# Altium PCB ukpg.PcbDoc
Units mm, origin at the board's own origin, x right, y up, seen from the top; angles counter-clockwise.
Board outline 54 x 58 mm, 2 copper layers (Top Layer, Bottom Layer); 7 components, 5 nets, 38 pads, 0 vias.
Unrouted connection lines stored in the file: 4.
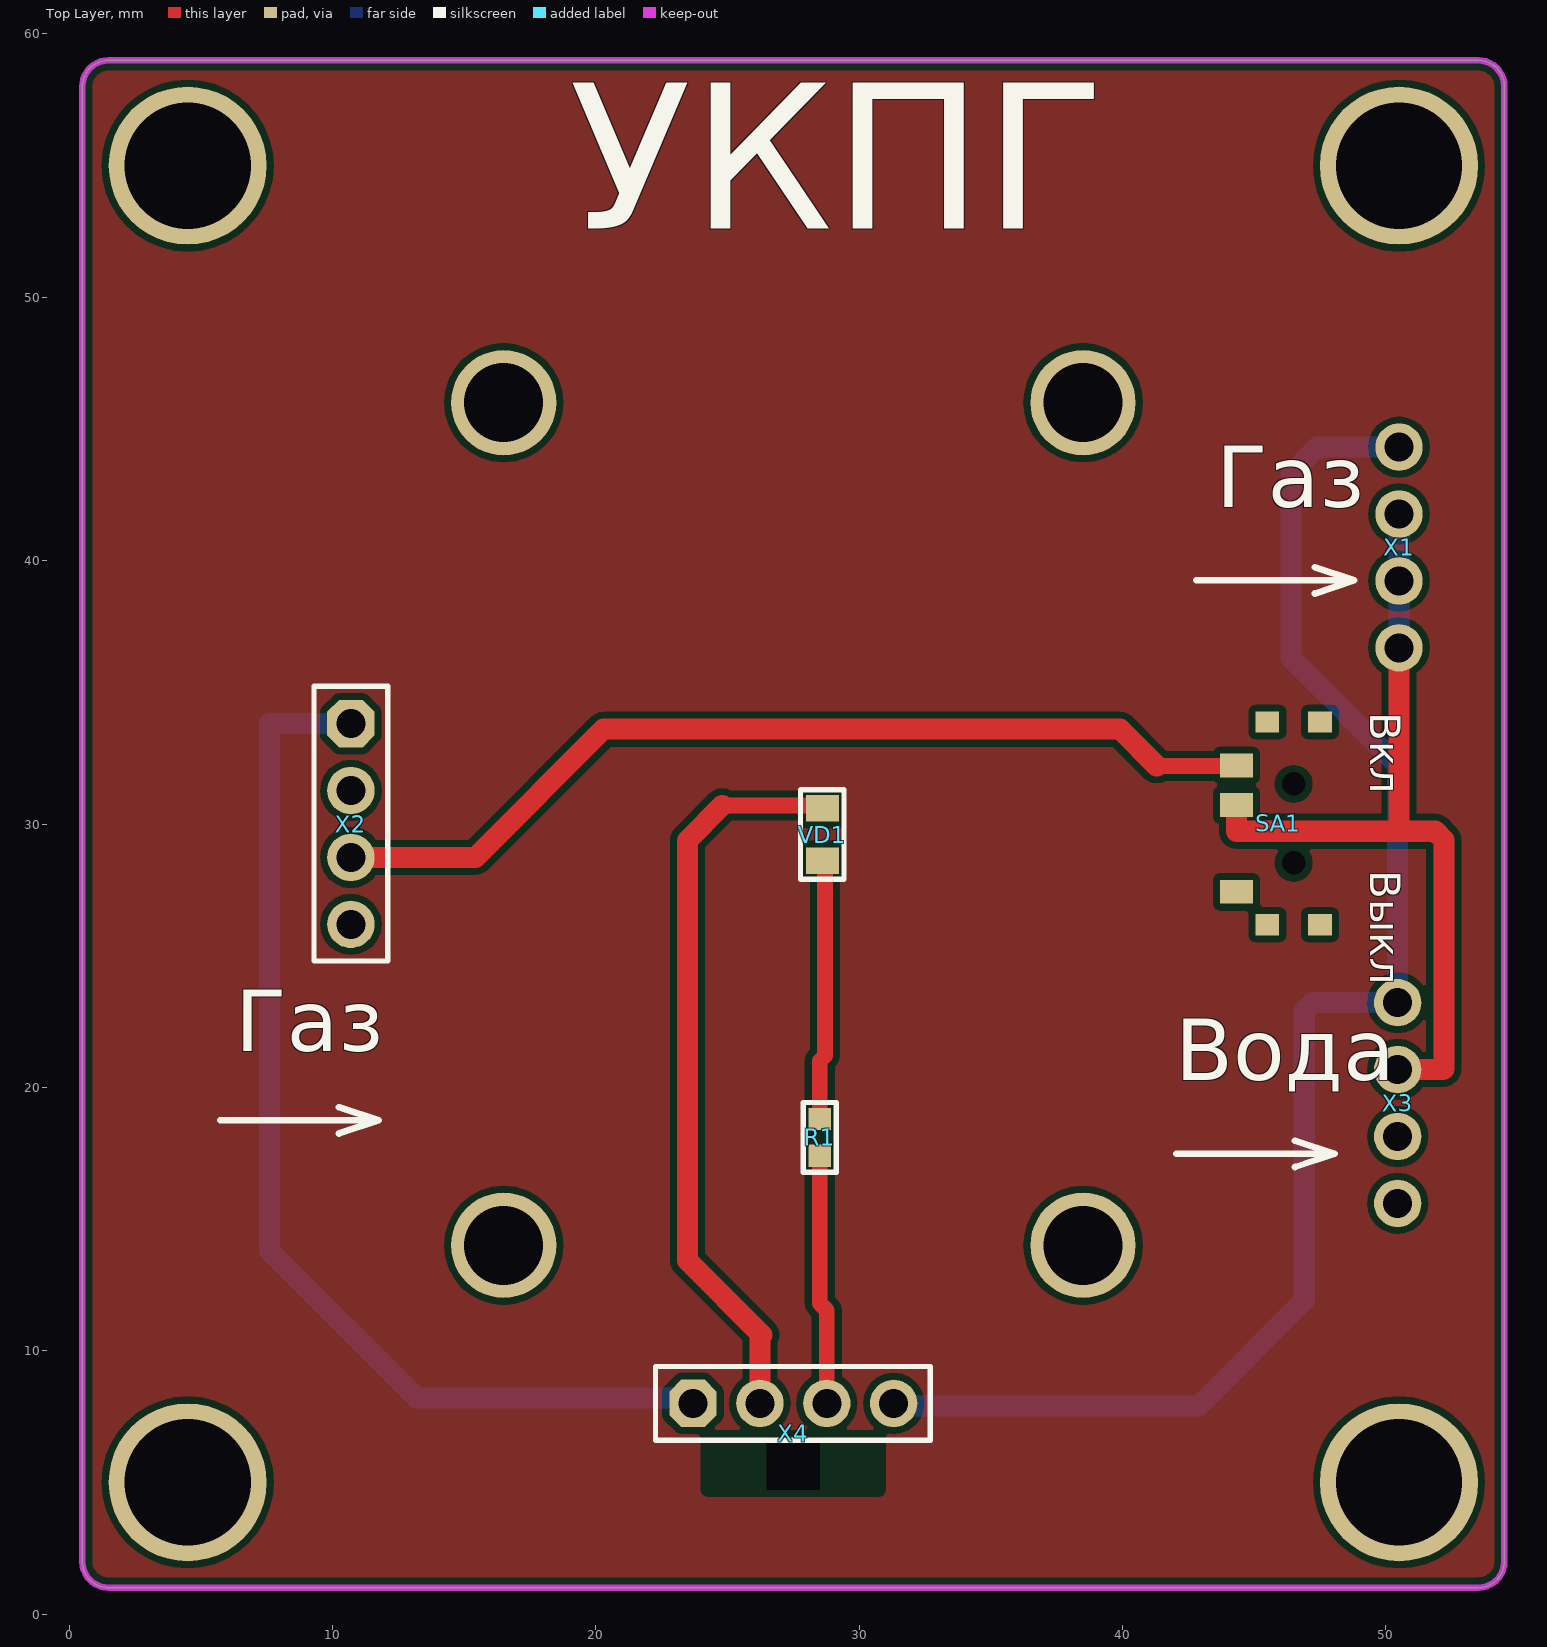
[diagram p0: Top Layer view]
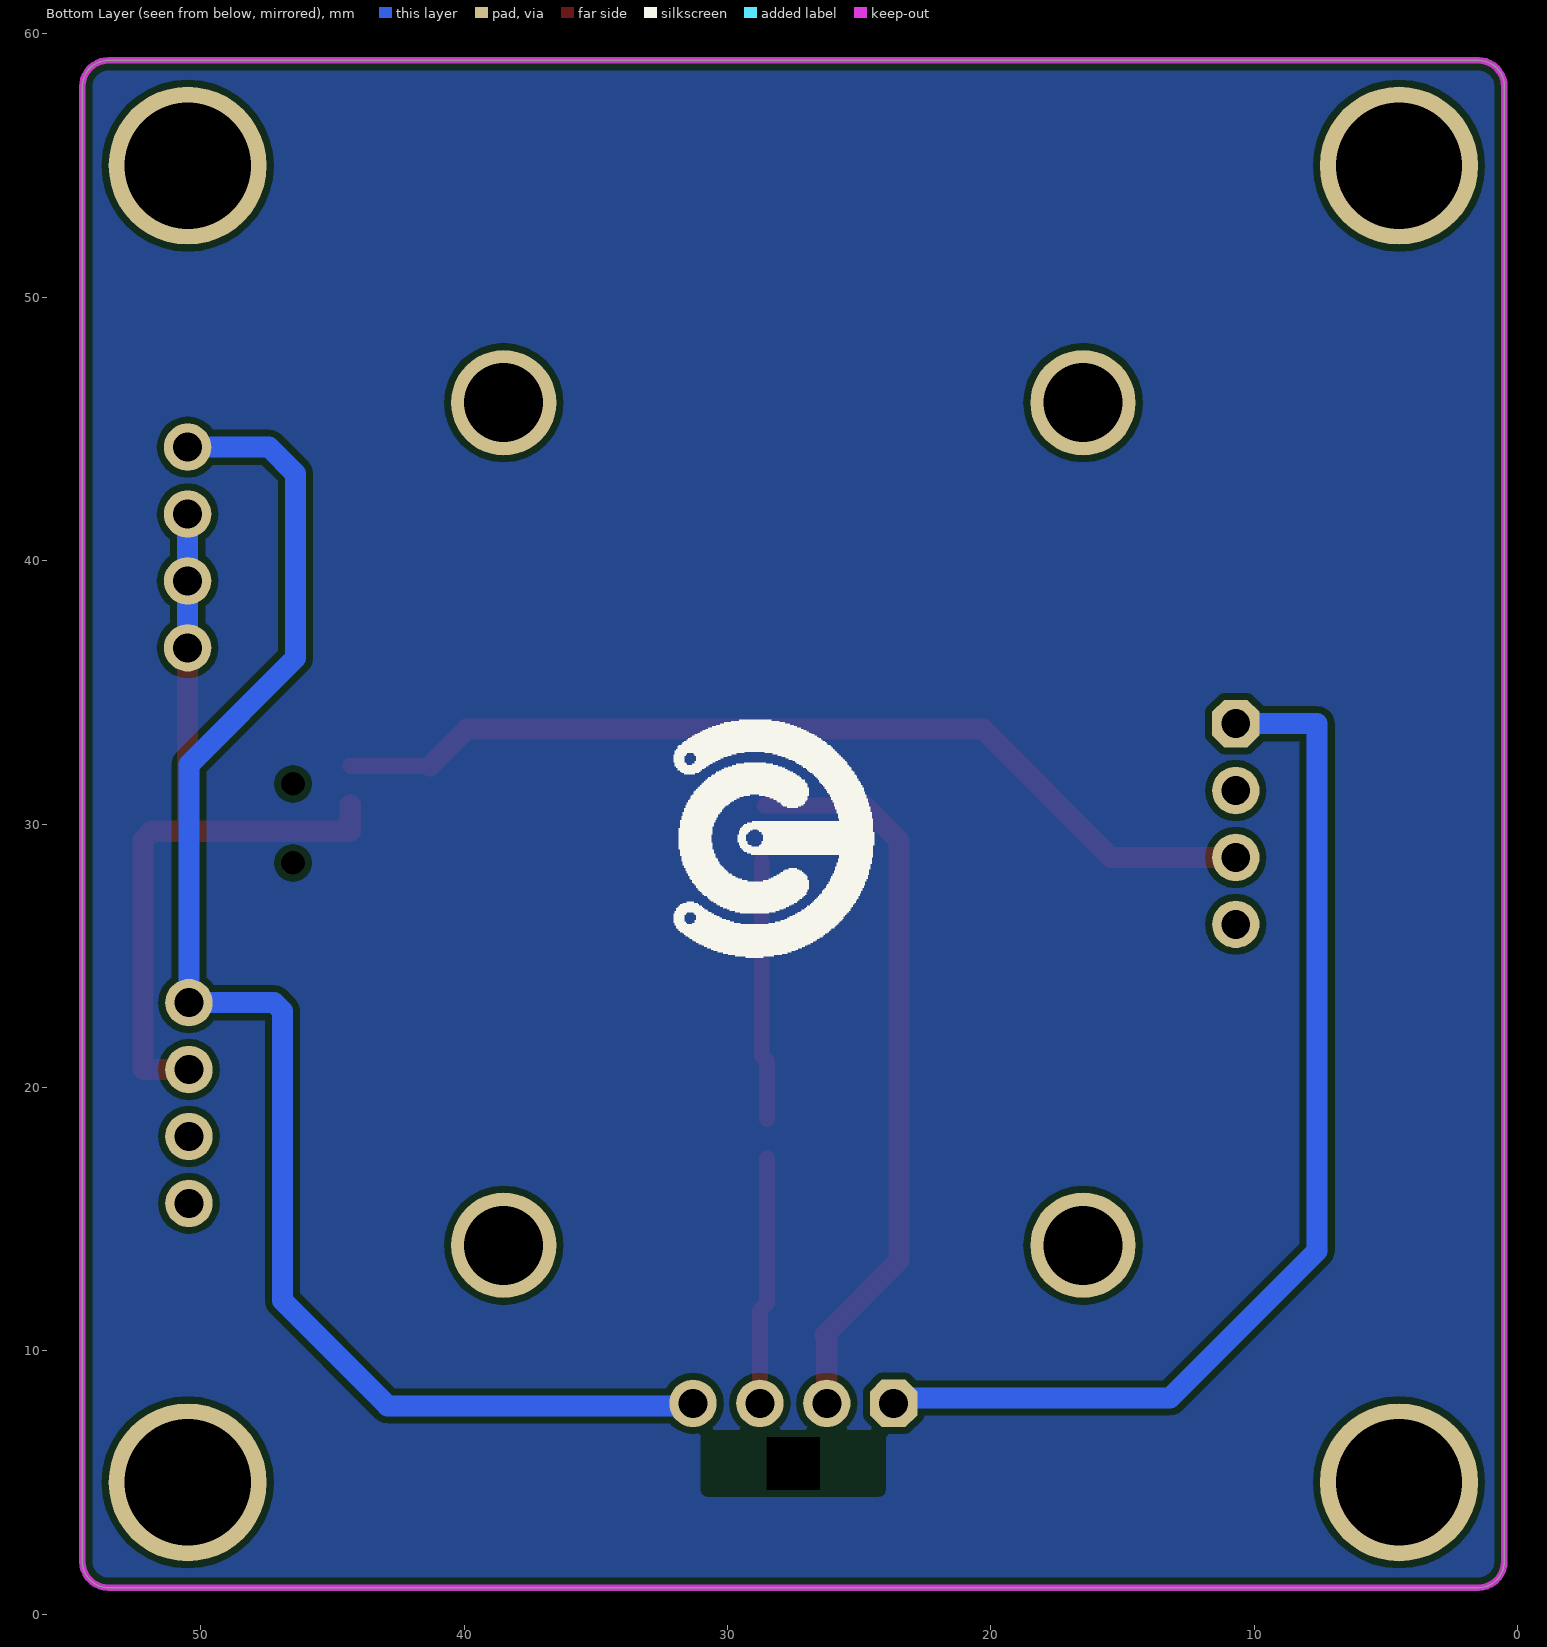
[diagram p1: Bottom Layer view, seen from below]

## Layer stack, top to bottom
Top Solder: solder mask 0.0102, Solder Resist, Dk 3.5
Top Layer: signal copper 0.0356
Dielectric 1: dielectric 0.32, FR-4, Dk 4.8
Bottom Layer: signal copper 0.0356
Bottom Solder: solder mask 0.0102, Solder Resist, Dk 3.5

## Board outline
0.5,2 0.5,58 cw(c1.5,58) 1.5,59 53.5,59 cw(c53.5,58) 54.5,58 54.5,2 cw(c53.5,2) 53.5,1 1.5,1 cw(c1.5,2)

## Design rules (kind name [scope] priority, off if disabled: settings)
Clearance [All] p1: gap=0.254 ignorepadtopadclearanceinfootprint=FALSE except(0: Arc-Hole Track-Hole SMDPad-Hole THPad-Hole Via-Hole Fill-Hole Poly-Hole Region-Hole Text-Hole)
PolygonConnect [All] p1: connectstyle=Relief reliefconductorwidth=0.254 reliefentries=4 polygonreliefangle="90 Angle" airgapwidth=0.254
RoutingVias [All] p1: holewidth=0.711 width=1.27 viastyle="Through Hole" minholewidth=0.711 minwidth=1.27 maxholewidth=0.711 maxwidth=1.27
SolderMaskExpansion [All] p1: expansion=0.102
Width [All] p1: maxlimit=10 minlimit=0.254 preferedwidth=0.254 minimp=50.000000 maximp=50.000000 favimp=50.000000
30 further rules are at their usual default settings.

## Components (designator, comment, footprint, x,y, rotation, side; value= is the part's Value field where it differs from the comment)
R1 "Resistor film, 100R, ±5%, 0603, 0.1W, -55...+125°C" "RES: 0603" 28.5,18.1 r270 top value=100R
SA1 "SS-3292S-L1" SS-3292S-L1 46.5,30 r0 top
VD1 "LED, *, *, *, -55...+150°C" "LED: 0805G" 28.6,29.6 r90 top
X1 "Connector, 4pin, 2.54mm, 500VAC, 3A" "4PLS RIGHT ANGLE 2" 50.5,40.5 r270 top
X2 "Connector, 4pin, 2.54mm, 500VAC, 3A" "CON: PBS-4 R" 10.7,30 r270 top
X3 "Connector, 4pin, 2.54mm, 500VAC, 3A" "4PLS RIGHT ANGLE 2" 50.45,19.405 r270 top
X4 "PBS-4 cut" "PBS-4 CUT" 27.5,8 r0 top

## Footprints (in the part's own frame and the unit in brackets; to place one, negate y for a bottom-side part, rotate by r counter-clockwise, add the part's x,y. Pads: shape width x height; smd on the part's side, far side on the other; paste and mask are expansions set on the pad)
"4PLS RIGHT ANGLE 2" [mm]
  round 1.8 hole 1.1: 1(-3.81,0) 2(-1.27,0) 3(1.27,0) 4(3.81,0)
  body extent -5.04,-0.32 5.14,10.04, height 2.57
"CON: PBS-4 R" [mm] "PBS-5"
  oct 1.8x1.8 hole 1.1: 1(-3.81,0)
  round 1.8 hole 1.1: 2(-1.27,0) 3(1.27,0) 4(3.81,0)
  silkscreen extent -5.23,-1.4 5.2,1.4, body extent -5.08,-10.2 5.08,0, height 2.54
"LED: 0805G" [mm]
  rect 1x1.25 smd: 1(-1,0) 2(1,0)
  silkscreen extent -1.7,-0.82 1.7,0.82, body extent -1.05,-0.67 1.05,0.68, height 0.9
"PBS-4 CUT" [mm]
  oct 1.8x1.8 hole 1.1: 1(-3.81,0)
  round 1.8 hole 1.1: 2(-1.27,0) 3(1.27,0) 4(3.81,0)
  rrect50% 0x0 hole 2 square: ""(0,-2.28)
  silkscreen extent -5.23,-1.4 5.2,1.4, body extent -5.08,-1.27 5.08,1.27, height 8.4
"RES: 0603" [mm]
  rect 0.85x0.85 smd: 1(-0.7,0) 2(0.7,0)
  silkscreen extent -1.33,-0.63 1.33,0.63, body extent -0.8,-0.4 0.8,0.4, height 0.44
SS-3292S-L1 [mm]
  rect 1.25x0.9 smd: 1(-2.175,-2.576) 2(-2.175,0.724) 3(-2.175,2.224)
  rect 0.9x0.8 smd: ""(-1,-3.826) ""(-1,3.874) ""(1,-3.826) ""(1,3.874)
  round 0 hole 0.9 unplated: ""(0,-1.476) ""(0,1.524)
  body extent -1.52,-4.32 1.52,4.44, height 6

## Part data
R1: library part Resistor_0603, Manufacturer=Yageo, Package=0603, PartNumber=RC0603JR-07100RL, Power=0.1W, Temperature=-55...+125°C, Tolerance=±5%, TypeResistor="Resistor film", HelpURL=https://www.digikey.com/product-detail/en/yageo/RC0603JR-07100RL/311-100GRCT-ND/729644, ValueManufacturerPartNumber="Resistor film, 100R, ±5%, 0603, 0.1W, -55...+125°C"
VD1: library part LED_single, Color=GREEN, Temperature=-55...+150°C, TypeDiode=LED, ValueManufacturerPartNumber="LED, *, *, *, -55...+150°C"
X1 X3: library part PLS-4, CurrentMax=3A, Manufacturer=Connfly, VoltageMax=500VAC, CommentText="\"Разъем\"", HelpURL=https://www.chipdip.ru/product/pls-4, Multichannel=4pin, PartNumber=PLS-4, Pitch=2.54mm, TypeConnector=Connector, ValueManufacturerPartNumber="Connector, 4pin, 2.54mm, 500VAC, 3A"
X2: library part PBS-4, CurrentMax=3A, Manufacturer=Connfly, VoltageMax=500VAC, CommentText="\"Разъем\"", HelpURL=https://www.chipdip.ru/product/pbs-4, Multichannel=4pin, PartNumber=PBS-4, Pitch=2.54mm, TypeConnector=Connector, ValueManufacturerPartNumber="Connector, 4pin, 2.54mm, 500VAC, 3A"

## Free pads (board coordinates)
  round 6 hole 4.8: ""(4.5,5) ""(4.5,55) ""(50.5,5) ""(50.5,55)
  round 4 hole 3: ""(16.5,14) ""(16.5,46) ""(38.5,14) ""(38.5,46)

## Nets (pads, with @x,y where several pads share a name; then routed paths per layer and width w, separated by ;. In a path a pad name is that pad's centre, name@x,y a point inside that pad or via, vN(x,y) a via of type N, cw(c..) or ccw(c..) an arc to the next point about the centre after c; other vN are vias at no path point)
GND: VD1.2 X1.1 X2.1 X3.1 X4.1 X4.2 X4.4 | length 128
  Top Layer w0.6: 24.8,30.7 VD1.2@28.6,30.7
  Top Layer w0.8: 24.8,30.7 23.481,29.381 23.481,13.419 26.3,10.6 26.23,10.53 X4.2
  Bottom Layer w0.8: X2.1 7.61,33.81 7.61,13.79 13.2,8.2 23.49,8.2 X4.1 ; X4.4@31.31,7.9 42.9,7.9 46.9,11.9 46.9,22.9 47.215,23.215 X3.1 50.45,32.25 46.4,36.3 46.4,43.3 47.41,44.31 X1.1
NetR1_1: R1.1 VD1.1 | length 9.9
  Top Layer w0.6: R1.1 28.5,21 28.7,21.2 VD1.1@28.7,28.6
NetSA1_2: SA1.2 X1.2 X1.3 X1.4 X3.2 | length 31.5
  Top Layer w0.8: SA1.2 44.325,29.725 50.425,29.725 ; X3.2 52.175,20.675 52.2,20.7 52.2,29.4 51.875,29.725 50.425,29.725 ; X1.4 50.5,29.8 50.425,29.725
  Bottom Layer w0.8: X1.4 X1.3 X1.2
NetSA1_3: SA1.3 X2.2 X2.3 X2.4 | length 36.2
  Top Layer w0.6: 41.3,32.2 44.301,32.2 SA1.3
  Top Layer w0.8: X2.3 15.43,28.73 20.3,33.6 39.9,33.6 41.3,32.2
VCC: R1.2 X4.3 | length 9.4
  Top Layer w0.6: R1.2@28.5,17.3 28.5,11.8 28.77,11.53 X4.3
pads on no net: SA1. SA1.1 X3.3 X3.4 X4.

## Polygon pours and split planes (outlines as drawn)
no net on Top Layer "Top Layer-No Net" (solid, pour order 4): 0.5,2 0.5,58 cw(c1.5,58) 1.5,59 53.5,59 cw(c53.5,58) 54.5,58 54.5,2 cw(c53.5,2) 53.5,1 1.5,1 cw(c1.5,2)
no net on Bottom Layer "Top Layer-No Net1" (solid, pour order 5): 0.5,2 0.5,58 cw(c1.5,58) 1.5,59 53.5,59 cw(c53.5,58) 54.5,58 54.5,2 cw(c53.5,2) 53.5,1 1.5,1 cw(c1.5,2)

## Keep-outs
Keep-Out Layer:
  the board outline again, w0.254

## Silkscreen, mask and mechanical layers (free items; w line width, h text height)
Top Overlay:
  lines w0.254: 5.75,18.75 11.75,18.75 ; 10.25,18.25 11.75,18.75 ; 10.25,19.25 11.75,18.75 ; 42.05,17.475 48.05,17.475 ; 42.8,39.25 48.8,39.25 ; 46.55,16.975 48.05,17.475 ; 46.55,17.975 48.05,17.475 ; 47.3,38.75 48.8,39.25 ; 47.3,39.75 48.8,39.25
  text "УКПГ" at 19,50.3 h12
  text "Газ" at 43.55,41.25 h4
  text "Вкл" at 49,34.25 h2 r270
  text "Выкл" at 49,28.25 h2 r270
  text "Газ" at 6.3,20.6 h4
  text "Вода" at 42,19.5 h4
Bottom Overlay:
  drawing of 376 lines, arcs and shapes, not listed